# Altium PCB 4007.PcbDoc
Units mm, origin at the board's own origin, x right, y up, seen from the top; angles counter-clockwise.
Board outline 19.8 x 24.8 mm, 2 copper layers (Top Layer, Bottom Layer), stack 1.021 mm thick; 26 components, 22 nets, 85 pads, 11 vias.
Unrouted connection lines stored in the file: 17.
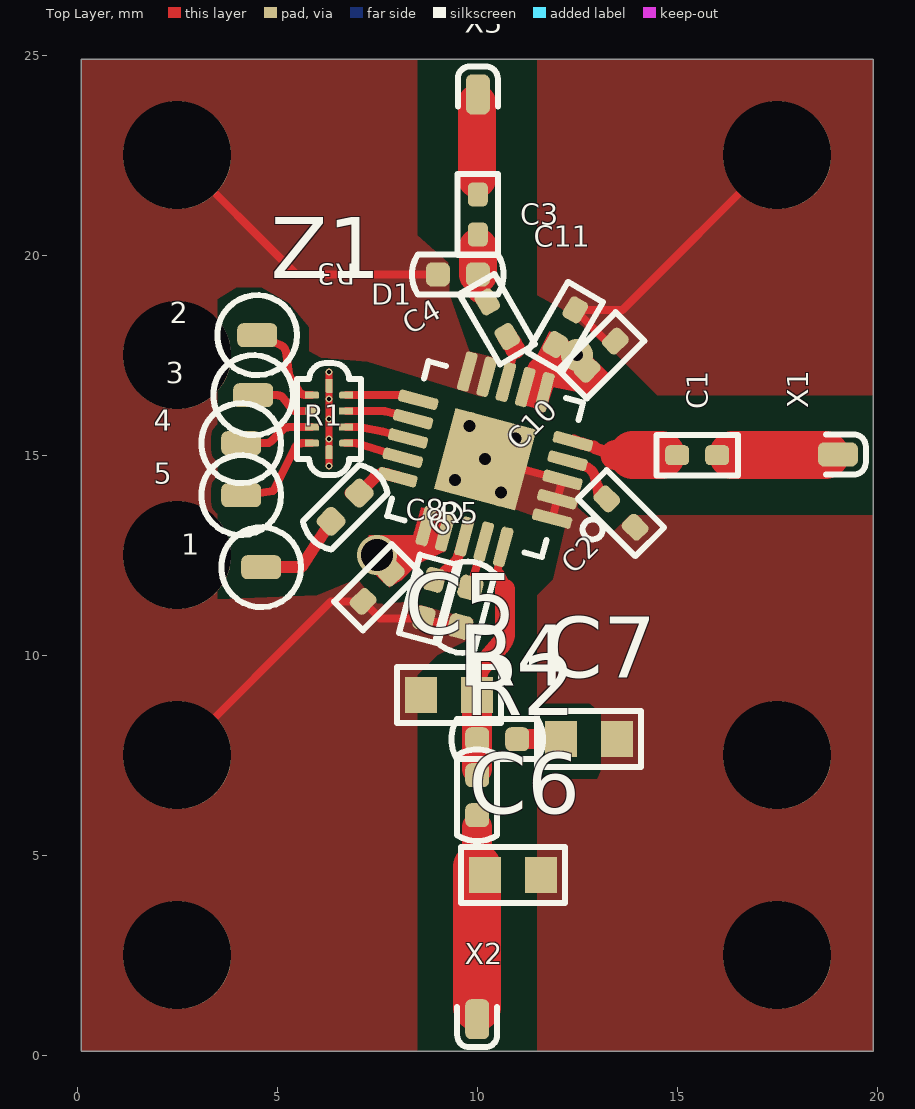
[diagram p0: Top Layer view]
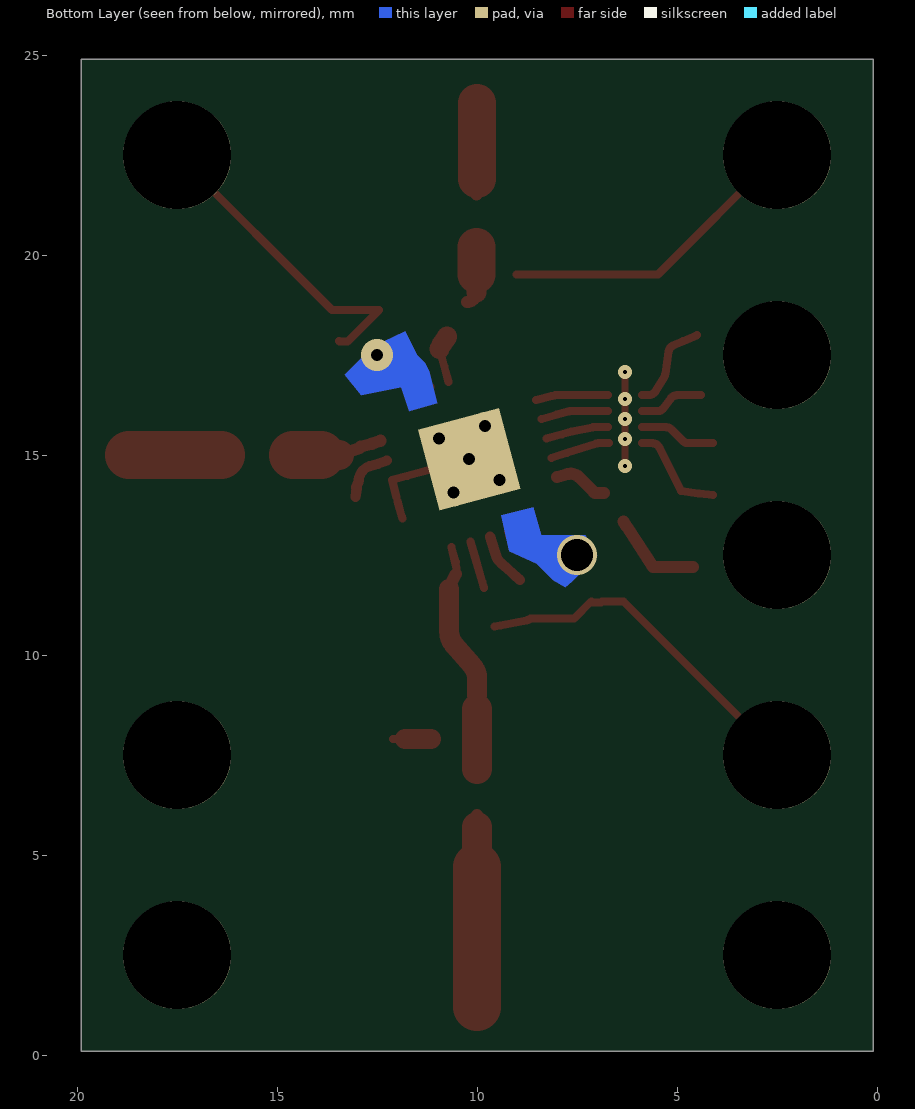
[diagram p1: Bottom Layer view, seen from below]

## Layer stack, top to bottom
Top Solder: solder mask 0.0102, Solder Resist, Dk 3.5
Top Layer: signal copper 0.0356
Dielectric 1: dielectric 0.95, FR-4, Dk 4.8
Bottom Layer: signal copper 0.0356
Bottom Solder: solder mask 0.0102, Solder Resist, Dk 3.5

## Board outline
0.1,0.1 0.1,24.9 19.9,24.9 19.9,0.1

## Design rules (kind name [scope] priority, off if disabled: settings)
Clearance Clearance_2 [All] p1: gap=0.254 ignorepadtopadclearanceinfootprint=FALSE except(0: Arc-Hole Track-Hole SMDPad-Hole THPad-Hole Via-Hole Fill-Hole Poly-Hole Region-Hole Text-Hole; 0.125: Arc-Arc Arc-Track Arc-SMDPad Arc-THPad Track-Track Track-SMDPad Track-THPad SMDPad-SMDPad SMDPad-THPad)
PlaneConnect [All] p1: planeconnectstyle=Direct reliefexpansion=0.508 reliefentries=4 reliefconductorwidth=0.254 reliefairgap=0.254
PolygonConnect PolygonConnect_1 [All vs IsNamedPolygon('GND_L01_P000')] p1: thpad.connectstyle=Direct thpad.reliefconductorwidth=0.254 thpad.reliefentries=4 thpad.polygonreliefangle="90 Angle" thpad.airgapwidth=0.254 smdpad.connectstyle=Direct smdpad.reliefconductorwidth=0.254 smdpad.reliefentries=4 smdpad.polygonreliefangle="90 Angle" smdpad.airgapwidth=0.254 via.connectstyle=Relief via.reliefconductorwidth=0.254 via.reliefentries=4 via.polygonreliefangle="90 Angle" via.airgapwidth=0.254
PolygonConnect [All] p2: connectstyle=Direct reliefconductorwidth=0.254 reliefentries=4 polygonreliefangle="90 Angle" airgapwidth=0.254
RoutingCorners [All] p1: cornerstyle=Round minsetback=2.54 maxsetback=2.54
RoutingVias [All] p1: holewidth=0.711 width=1.27 viastyle="Through Hole" minholewidth=0.711 minwidth=1.27 maxholewidth=0.711 maxwidth=1.27
SolderMaskExpansion [All] p1: expansion=0.102 istentingtop=FALSE
UnpouredPolygon [InNet('Net1_1') And OnLayer('Top Layer')] p1:
Width [All] p1: maxlimit=1.3 minlimit=0.125 preferedwidth=0.254
27 further rules are at their usual default settings.

## Classes and differential pairs
component class 4007: 1 2 3 4 5 C1 C2 C3 C4 C9 C10 C11 D1 R1 R4 R5 X1 X2 X3 X4 X8 Z1

## Components (designator, comment, footprint, x,y, rotation, side; value= is the part's Value field where it differs from the comment)
1 "TP" TP1 4.6,12.2 r180 top
2 "TP" TP1 4.5,18 r180 top
3 "TP" TP1 4.4,16.5 r180 top
4 "TP" TP1 4.1,15.3 r180 top
5 "TP" TP1 4.1,14 r180 top
C1 "100" CAPC1005L 15.5,15 r180 top value={Value}
C2 "100" CAPC1005L 13.594,13.553 r135 top value={Value}
C3 "1000" CAPC1005L 10.015,21.018 r90 top value={Value}
C4 "1000" CAPC1005L 10.5,18.4 r120 top value={Value}
C5 "270" CAPC1608L 9.3,9 r0 top value={Value}
C6 "270" CAPC1608L 10.9,4.5 r180 top value={Value}
C7 "270" CAPC1608L 12.8,7.9 r180 top value={Value}
C8 "100" CAPC1005L 8.8,11.4 r255 top value={Value}
C9 "100" CAPC1005L 7.5,11.7 r225 top value={Value}
C10 "100" CAPC1005L 13.1,17.5 r45 top value={Value}
C11 "100" CAPC1005L 12.2,18.2 r60 top value={Value}
D1 "ADF4002BCPZ" QFN50P400X400X100-20N 10.2,14.9 r165 top
R1 "100" RESC1005L 6.7,13.7 r45 top value={Value}
R2 "100" RESC1005L 10,6.5 r90 top value={Value}
R3 "51" RESC1005L 9.515,19.518 r180 top value={Value}
R4 "100" RESC1005L 10.5,7.9 r180 top value={Value}
R5 "5,1 к" RESC1005L 9.7,11.2 r75 top value={Value}
X1 "СРГ-50-751ФВ" TP0.6X1 19.015,15.018 r0 top
X2 "СРГ-50-751ФВ" TP0.6X1 10,0.9 r270 top
X3 "СРГ-50-751ФВ" TP0.6X1 10.015,24.018 r90 top
Z1 "NFA18SL****1A45" FIL_NFA18SL 6.3,15.9 r0 top

## Footprints (in the part's own frame and the unit in brackets; to place one, negate y for a bottom-side part, rotate by r counter-clockwise, add the part's x,y. Pads: shape width x height; smd on the part's side, far side on the other; paste and mask are expansions set on the pad)
CAPC1005L [mm] "Chip Capacitor, Body 1.0x0.5mm, IPC High Density"
  rrect50% 0.6x0.5 smd: 1(-0.5,0) 2(0.5,0)
  Top Layer pour cut-out: -0.2,0.5 -0.2,-0.5 0.2,-0.5 0.2,0.5
  silkscreen extent -1.02,-0.51 1.02,0.51, body extent -0.55,-0.3 0.55,0.3, height 0.6
CAPC1608L [mm] "Chip Capacitor, Body 1.6x0.8mm, IPC High Density"
  rect 0.8x0.9 smd: 1(-0.7,0) 2(0.7,0)
  Top Layer pour cut-out: -0.3,0.7 -0.3,-0.7 0.3,-0.7 0.3,0.7
  silkscreen extent -1.3,-0.7 1.3,0.7, body extent -0.87,-0.48 0.87,0.48, height 0.85
FIL_NFA18SL [mm] "Chip Array, Flat, 8-Leads, Pitch 0,40mm,  Body 1,60x0,80mm,  IPC Medium Density"
  rect 0.175x0.1 smd mask+0.05: 1(0,-0.95) 1(0,0.95)
  rrect50% 0.175x0.35 smd mask+0.05: 1(0,0.825) 2(0,-0.825)
  rrect50% 0.35x0.175 smd paste+0.015 mask+0.05: 3(0.425,0.6) 6(0.425,-0.6) 7(-0.425,0.6) 10(-0.425,-0.6)
  rect 0.1x0.175 smd paste+0.015 mask+0.05: 3(0.55,0.6) 6(0.55,-0.6) 7(-0.55,0.6) 10(-0.55,-0.6)
  rect 0.35x0.175 smd paste+0.015 mask+0.05: 4(0.425,0.2) 5(0.425,-0.2) 8(-0.425,0.2) 9(-0.425,-0.2)
  Top Layer lines w0.175: 0,-1.175 0,-0.825 0,0.825 ; 0,1.175 0,0.85 ; 0,0.85 0,0.85
  silkscreen extent -0.8,-1.4 0.8,1.4, body extent -0.5,-0.85 0.5,0.85, height 0.65
QFN50P400X400X100-20N [mm] "QFN, 20-Leads, Body 4,0x4,0mm (max), Pitch 0,50mm, IPC Medium Density"
  rrect50% 1x0.3 smd mask+0.03: 1(-2,1) 2(-2,0.5) 3(-2,0) 4(-2,-0.5) 5(-2,-1) 11(2,-1) 12(2,-0.5) 13(2,0) 14(2,0.5) 15(2,1)
  rrect50% 0.3x1 smd mask+0.03: 6(-1,-2) 7(-0.5,-2) 8(0,-2) 9(0.5,-2) 10(1,-2) 16(1,2) 17(0.5,2) 18(0,2) 19(-0.5,2) 20(-1,2)
  rect 2.1x2.1 hole 0.3: EPAD(0,0)
  silkscreen extent -3.3,-2 2,2, body extent -2,-2 2,2, height 0.92
RESC1005L [mm] "Chip Resistor, Body 1.1x0.5mm, IPC High Density"
  rrect50% 0.6x0.6 smd: 1(-0.5,0) 2(0.5,0)
  Top Layer pour cut-out: -0.2,0.5 -0.2,-0.5 0.2,-0.5 0.2,0.5
  silkscreen extent -1.15,-0.5 1.15,0.5, body extent -0.55,-0.3 0.55,0.3, height 0.4
TP0.6X1 [mm] "Точка пайки переход СРГ-50-751 (плата заштифтована)"
  rrect50% 1x0.6 smd paste-25.4: 1(0,0)
  silkscreen extent -0.3,-0.5 0.7,0.5
TP1 [mm] "Test point 1x1.6"
  rrect50% 1x0.6 smd paste+0: 1(0,0)
  silkscreen extent -1,-1 1,1

## Part data
1 2 3 4 5: "Test point"
C1 C2 C3 C4 C8 C9 C10 C11: library part C0402, "Чип-конденсатор", Power/Voltage={Voltage}, Tolerance={Tolerance}, Name=0402, TKE/TKC={TKE/TKC}, Type=Конденсатор
C5 C6 C7: library part C0603, "Чип-конденсатор", Power/Voltage={Voltage}, Tolerance={Tolerance}, Name=0603, TKE/TKC={TKE/TKC}, Type=Конденсатор
D1: library part ADF4007BCPZ, "Phase Detector/Frequency Synthesizer", Manufacturer="Analog Devices", Package="CP-20-1 (LFCSP_VQ)", ManufacturerPartNumber=ADF4002BCPZ, Type=Микросхема
R1 R2 R3 R4 R5: library part R0402, "Чип-резистор", Tolerance={Tolerance}, Name=0402, Type=Резистор
X1 X2 X3: "Переход", ManufacturerPartNumber=СРГ-50-751ФВ, TU/GOST="ВР0.364.049 ТУ", Type=Переход
Z1: library part NFA18SL, "LC filter 4-line array", Manufacturer*=Murata, Package=0603, ManufacturerPartNumber=NFA18SL****1A45, Type=Фильтр

## Free pads (board coordinates)
  round 2.7 hole 2.7: 1(2.5,2.5) 1(2.5,7.5) 1(2.5,12.5) 1(2.5,17.5) 1(2.5,22.5) 1(17.5,2.5) 1(17.5,7.5) 1(17.5,22.5)

## Via types
v1: diameter 0.175/0.35 (per signal layer), hole 0.1, Top Layer to Bottom Layer, 5 vias
v2: diameter 0.7, hole 0.3, Top Layer to Bottom Layer, 4 vias
v3: diameter 1, hole 0.8, Top Layer to Bottom Layer, 1 vias
v4: diameter 0.8, hole 0.3, Top Layer to Bottom Layer, 1 vias

## Nets (pads, with @x,y where several pads share a name; then routed paths per layer and width w, separated by ;. In a path a pad name is that pad's centre, name@x,y a point inside that pad or via, vN(x,y) a via of type N, cw(c..) or ccw(c..) an arc to the next point about the centre after c; other vN are vias at no path point)
+5V: C8.1 C9.1 C10.1 C11.1 D1.6 D1.7 D1.16 D1.17 D1.18 | length 5
  Top Layer w0.254: C9.1 7.863,12.061 7.987,12.164 8.003,12.18 8.447,12.555 ; 8.447,12.556 ccw(c8.283,12.749) 8.522,12.665 ; 8.522,12.665 8.61,12.919 8.653,12.9 8.824,12.823 ccw(c8.927,13.055) 8.861,12.81 9.083,12.751 9.173,12.994 D1.17 ; C8.1 C8.1@9.085,12.02 ; C8.1@9.086,12.021 9.394,12.295 ccw(c9.226,12.485) 9.405,12.305 9.457,12.357 ccw(c9.277,12.536) 9.519,12.458 9.568,12.613 D1.18 ; D1.7 11.445,16.637 11.446,16.637 ccw(c11.511,16.882) 11.754,16.81 11.893,17.278 ; 11.894,17.279 ccw(c11.65,17.35) 11.903,17.324 11.929,17.569 11.933,17.577 C11.1
  other v3: 7.5,12.5
  other v4: 12.5,17.5
GND: C2.1 C5.1 C6.1 C7.1 C8.2 C9.2 C10.2 C11.2 D1.1 D1.2 D1.3 D1.9 D1.10 D1.EPAD pad.1 R3.2 R5.1 | length 27.5
  Top Layer w0.2: pad.1@2.5,7.5 6.346,11.346 6.885,11.346 6.911,11.321 7.121,11.321 C9.2 7.576,10.917 8.67,10.917 8.683,10.907 ccw(c8.803,11.067) 8.738,10.878 8.765,10.871 9.423,10.745 R5.1 ; pad.1@2.5,22.5 5.482,19.518 R3.2 ; D1.EPAD 11.118,14.654 11.745,14.486 D1.3 12.119,14.334 D1.2@12.015,13.948 ; D1.1 11.886,13.465 D1.2@11.99,13.851 ; C10.2 13.446,17.846 13.237,17.846 C11.2 13.633,18.633 pad.1@17.5,22.5
  other v2: 10.598,14.069 9.439,14.379 10.961,15.421 9.802,15.731
Net1_1: 1.1 R1.1 | length 2.4
  Top Layer w0.3: 1.1 5.6,12.2 6.257,13.209 6.264,13.216 R1.1
Net2_1: 2.1 Z1.7 | length 2.3
  Top Layer w0.2: 2.1 4.85,17.85 5.097,17.744 cw(c5.018,17.56) 5.216,17.59 5.216,17.589 5.294,17.039 ccw(c5.492,17.068) 5.308,16.991 5.321,16.965 5.543,16.596 ccw(c5.713,16.7) 5.712,16.5 Z1.7@5.749,16.5 ; Z1.7@5.75,16.5 Z1.7@5.875,16.5
Net3_1: 3.1 Z1.8 | length 1.6
  Top Layer w0.2: 3.1 5,16.5 cw(c5,16.3) 5.16,16.42 5.341,16.179 ccw(c5.5,16.3) 5.499,16.1 Z1.8
Net4_1: 4.1 Z1.9 | length 1.9
  Top Layer w0.2: 4.1 4.717,15.3 ccw(c4.717,15.5) 4.858,15.358 5.141,15.641 cw(c5.283,15.5) 5.283,15.7 Z1.9
Net5_1: 5.1 Z1.10 | length 2.5
  Top Layer w0.2: 5.1 4.45,14.047 4.473,14.047 4.9,14.1 5.445,15.19 cw(c5.624,15.1) 5.624,15.3 Z1.10@5.875,15.3
NetC1_1: C1.1 X1.1 | length 3.1
  Top Layer w0.254: C1.1 16.4,15 ; X1.1@18.665,15.002 X1.1
  Top Layer w1.2: 16.4,15 X1.1@18.7,15
NetC1_2: C1.2 D1.5 | length 2.2
  Top Layer w0.305: D1.5@12.416,15.361 12.632,15.286 12.912,15.211 12.945,15.178 13.461,15
  Top Layer w0.75: 13.461,15 13.9,15
  Top Layer w1.2: 13.9,15 14.6,15
NetC2_2: C2.2 D1.4 | length 1.4
  Top Layer w0.254: D1.4 12.487,14.781 12.492,14.78 12.664,14.734 cw(c12.562,14.345) 12.706,14.72 cw(c12.562,14.345) 12.963,14.375 ccw(c13.216,14.396) 12.985,14.289 13.023,14.207 cw(c12.792,14.101) 13.031,14.187 13.011,14.163 C2.2@13.046,13.954
NetC3_1: C3.1 C4.2 R3.1 | length 1.5
  Top Layer w0.3: 10.015,19.068 ccw(c10.25,19.068) C4.2
  Top Layer w0.5: 10.015,19.068 R3.1
  Top Layer w0.95: R3.1 10.015,20.2
NetC3_2: C3.2 X3.1 | length 2.9
  Top Layer w0.3: 10,21.9 10,21.534 C3.2 ; 10,23.4 10,24.003 X3.1
  Top Layer w0.95: 10,21.9 X3.1@10,23.8
NetC4_1: C4.1 D1.8 | length 1.2
  Top Layer w0.2: D1.8 10.823,17.218 10.943,17.657
  Top Layer w0.3: C4.1@10.888,17.765 cw(c10.472,17.483) 10.943,17.658
  Top Layer w0.5: C4.1 C4.1@10.754,17.959 ; C4.1@10.755,17.96 C4.1@10.888,17.765
NetC5_2: C5.2 D1.20 R2.2 R4.2 | length 6
  Top Layer w0.2: R2.2 R2.2@10,7.15 ; C5.2@10,8.65 C5.2 ; 10.517,12.17 ccw(c10.712,12.124) 10.532,12.036 ; 10.517,12.171 10.554,12.321 D1.20 ; 10.679,11.742 10.679,11.741 cw(c10.5,11.653) 10.7,11.653
  Top Layer w0.3: 10.532,12.036 10.679,11.742
  Top Layer w0.5: C5.2 10,9.414 cw(c10.5,9.412) 10.125,9.742 10.576,10.259 ccw(c10.2,10.588) 10.7,10.588 10.7,11.653
  Top Layer w0.75: R2.2@10,7.15 R4.2 C5.2@10,8.65
NetC6_2: C6.2 R2.1 X2.1 | length 4.8
  Top Layer w0.3: 10,5.7 R2.1
  Top Layer w0.75: C6.2@10,4.7 10,5.7
  Top Layer w1.2: X2.1@10,1.2 C6.2@10,4.7
NetC7_2: C7.2 R4.1 | length 1.1
  Top Layer w0.2: R4.1 R4.1@11.15,7.9 ; C7.2@11.8,7.9 C7.2
  Top Layer w0.5: R4.1@11.15,7.9 C7.2@11.8,7.9
NetD1_11: D1.11 Z1.3 | length 2.2
  Top Layer w0.2: Z1.3@6.725,16.5 6.85,16.5 7.898,16.5 ccw(c7.898,16.7) 7.902,16.5 8.013,16.503 ; 8.014,16.503 cw(c8.017,16.303) 8.065,16.497 8.129,16.481 8.138,16.479 D1.11 D1.11@8.14,16.486
NetD1_12: D1.12 Z1.4 | length 1.7
  Top Layer w0.2: Z1.4 7.675,16.1 7.676,16.1 cw(c7.675,15.9) 7.724,16.094 7.87,16.056 8,16.018 8.014,16.014 D1.12
NetD1_13: D1.13 Z1.5 | length 1.6
  Top Layer w0.2: Z1.5 7.08,15.7 7.081,15.7 cw(c7.08,15.5) 7.12,15.696 7.636,15.59 7.637,15.59 7.882,15.523 D1.13
NetD1_14: D1.14 Z1.6 | length 1.5
  Top Layer w0.2: Z1.6@6.7,15.3 6.725,15.3 6.85,15.3 6.969,15.3 cw(c6.969,15.1) 7.029,15.291 ; 7.03,15.29 7.757,15.057 D1.14
NetD1_15: D1.15 R1.2 | length 1.7
  Top Layer w0.3: R1.2@6.833,14.054 R1.2 7.16,14.16 7.227,14.227 7.451,14.451 ; 7.451,14.451 cw(c7.663,14.239) 7.745,14.527 D1.15 D1.15@7.709,14.532
NetD1_19: D1.19 R5.2 | length 1.2
  Top Layer w0.2: R5.2 9.871,11.827 10.054,12.455 D1.19
pads on no net: Z1.1 Z1.2
copper on no net: | length 0.4
  Top Layer w0.2: 10.536,12.325 10.648,12.709
  other v1: 6.3,14.725 6.3,15.4 6.3,15.9 6.3,16.4 6.3,17.075

## Polygon pours and split planes (outlines as drawn)
GND on Top Layer "GND_L01_P005" (solid, remove dead copper, pour order 5): 13.802,13.5 13.229,13.069 12.5,13.7 12.6,14.3 11.118,14.654 10.8,13.7 12.2,13.2 11.9,11.9 11.5,11.5 11.5,8.8 12.8,8.8 13.093,8.562 13.093,7.1 13,6.9 11.5,6.9 11.5,0.1 19.9,0.1 19.9,13.5
GND on Top Layer "GND_L01_P006" (solid, remove dead copper, pour order 6): 8.5,0.1 8.5,9.5 9,10 9.8,10.4 9.9,10.9 8.265,11.336 7.505,11.281 7.005,11.912 6,11.5 3.5,11.4 3.5,18.9 3.993,19.196 4.6,19.196 5.3,18.8 5.8,18.2 5.8,17.6 6.1,17.433 7.26,17.34 10.3,16.4 10.529,17.433 9.8,17.6 9.3,19.018 9.3,19.379 9.3,19.8 8.5,20.5 8.5,24.9 0.1,24.9 0.1,0.1
GND on Top Layer "GND_L01_P004" (solid, remove dead copper, pour order 4): 11.5,24.9 11.5,19 12.118,18.658 13.5,17.5 14,17 14.5,16.5 19.9,16.5 19.9,24.9

## Other copper
Multi-Layer:
  region net +5V: 7,12.5 7.3,13 8.4,13 8.6,13.7 9.4,13.5 9.2,12.6 8.512,12.288 8.101,11.877 7.8,11.7 7.641,11.841
  region net +5V: 11,16.3 11.2,17.1 11.3,17.3 11.5,17.5 11.8,18.1 12.605,17.712 13.312,17.005 12.9,16.5 11.9,16.7 11.7,16.1

## Silkscreen, mask and mechanical layers (free items; w line width, h text height)
Top Solder:
  rectangle: 8.398,6.7 11.5,25
  rectangle: 0,0.1 5,25
  rectangle: 15,0.1 20,25
  rectangle: 0.015,0.1 20,9.8
  rectangle: 0.015,20.018 20.015,25.018
  lines w2.5: 12.9,15 16.4,15
Bottom Solder:
  rectangle: 0.015,0.1 20.015,25.018
Mechanical 1:
  the board outline again, w0.254
Mechanical 3:
  circle w0.254: c7.5,17.5 r1.219
  circle w0.254: c12.5,17.5 r1.219
  circle w0.254: c12.5,12.5 r1.219
  circle w0.254: c7.5,12.5 r1.219
  circle w0.254: c2.5,12.5 r1.219
  circle w0.254: c17.5,12.5 r1.219
  circle w0.254: c2.5,17.5 r1.219
  circle w0.254: c17.5,17.5 r1.219
  circle w0.254: c2.5,22.5 r1.219
  circle w0.254: c12.5,22.5 r1.219
  circle w0.254: c17.5,22.5 r1.219
  circle w0.254: c7.5,22.5 r1.219
  circle w0.254: c17.5,7.5 r1.219
  circle w0.254: c12.5,7.5 r1.219
  circle w0.254: c7.5,7.5 r1.219
  circle w0.254: c2.5,7.5 r1.219

## Text inside footprints (layer, text, board x,y; h text height)
Z1: Mechanical 20 "Отв. 0,1  / заполнить" at 4.575,17.375 h1